# Altium PCB PSM.PcbDoc
Units mm, origin at the board's own origin, x right, y up, seen from the top; angles counter-clockwise.
Board outline 22.96 x 19.96 mm, 4 copper layers (Top, Ground, Power, Bottom), stack 0.79 mm thick; 64 components, 48 nets, 238 pads, 58 vias.
Unrouted connection lines stored in the file: 21.
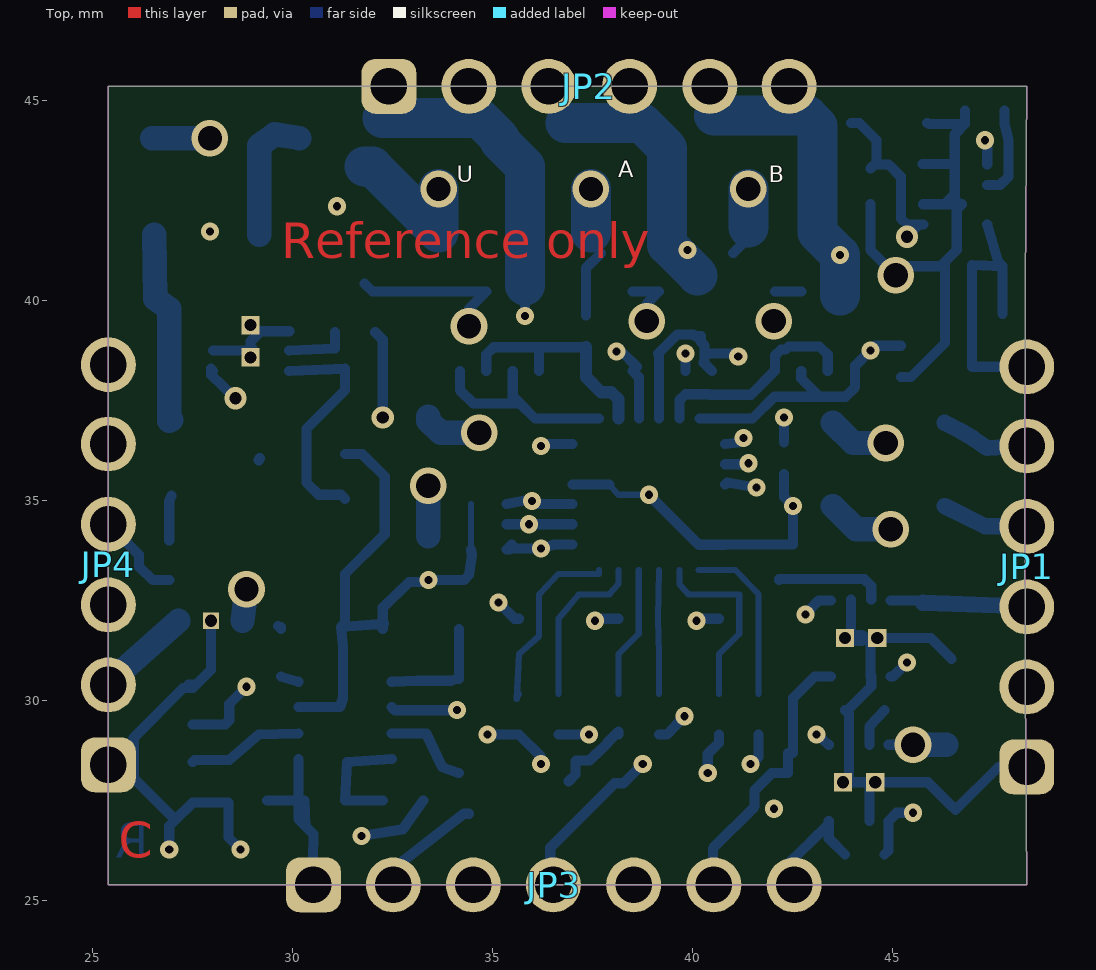
[diagram p0: Top view]
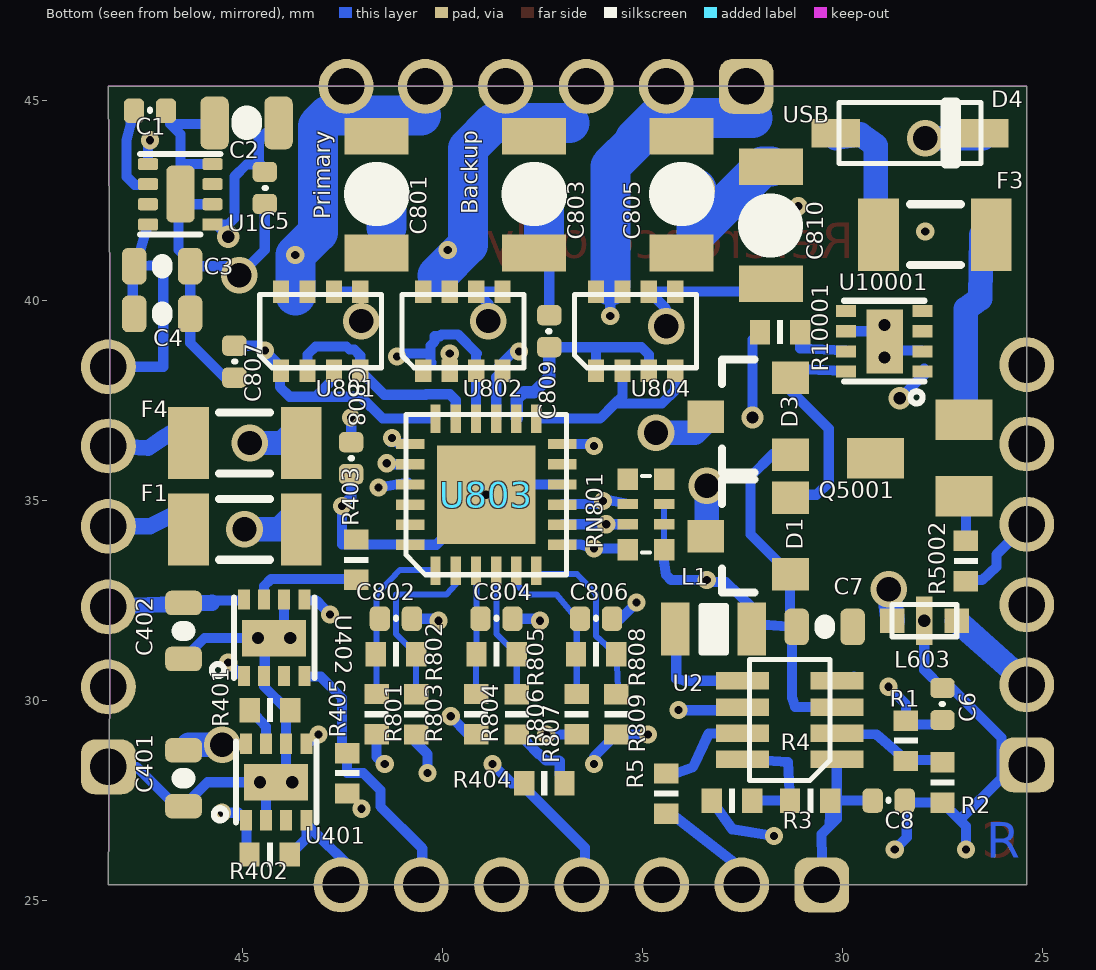
[diagram p1: Bottom view, seen from below]
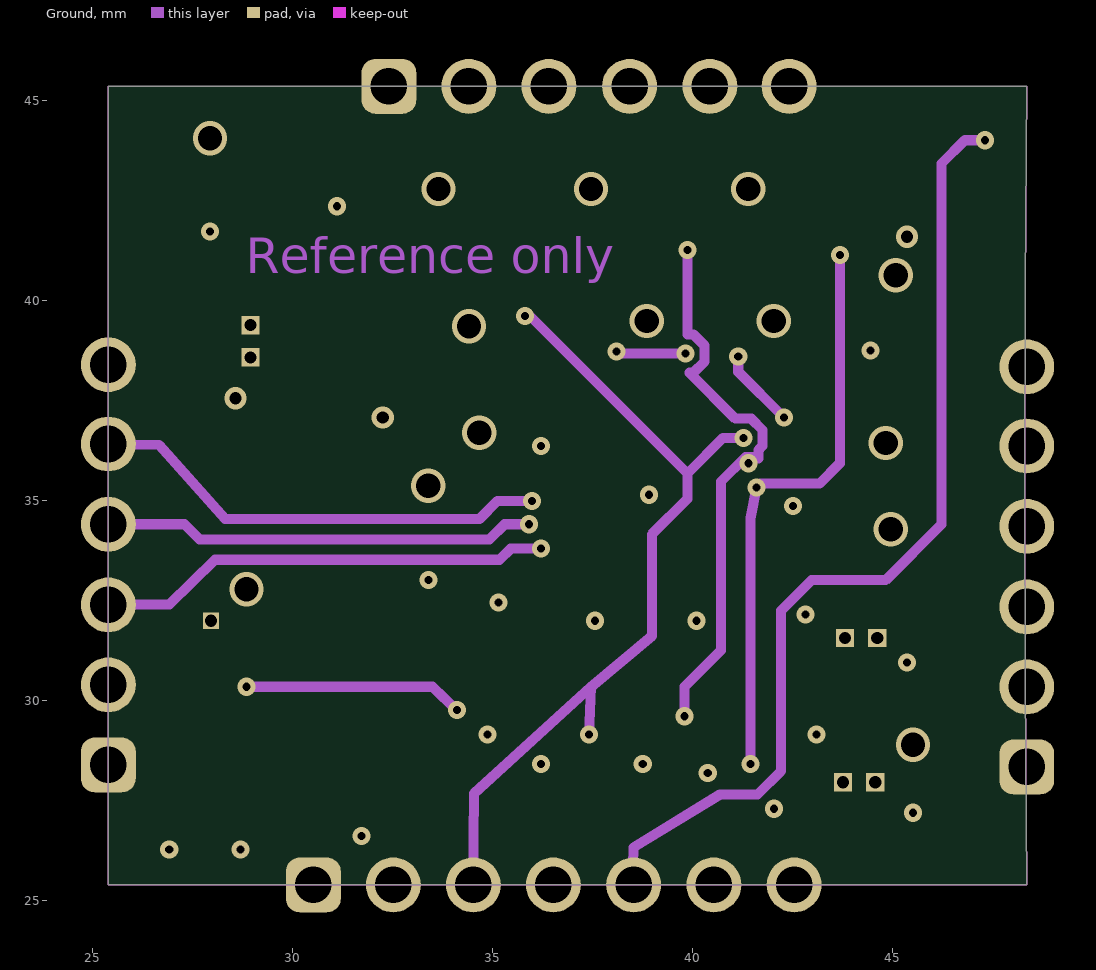
[diagram p2: Ground]
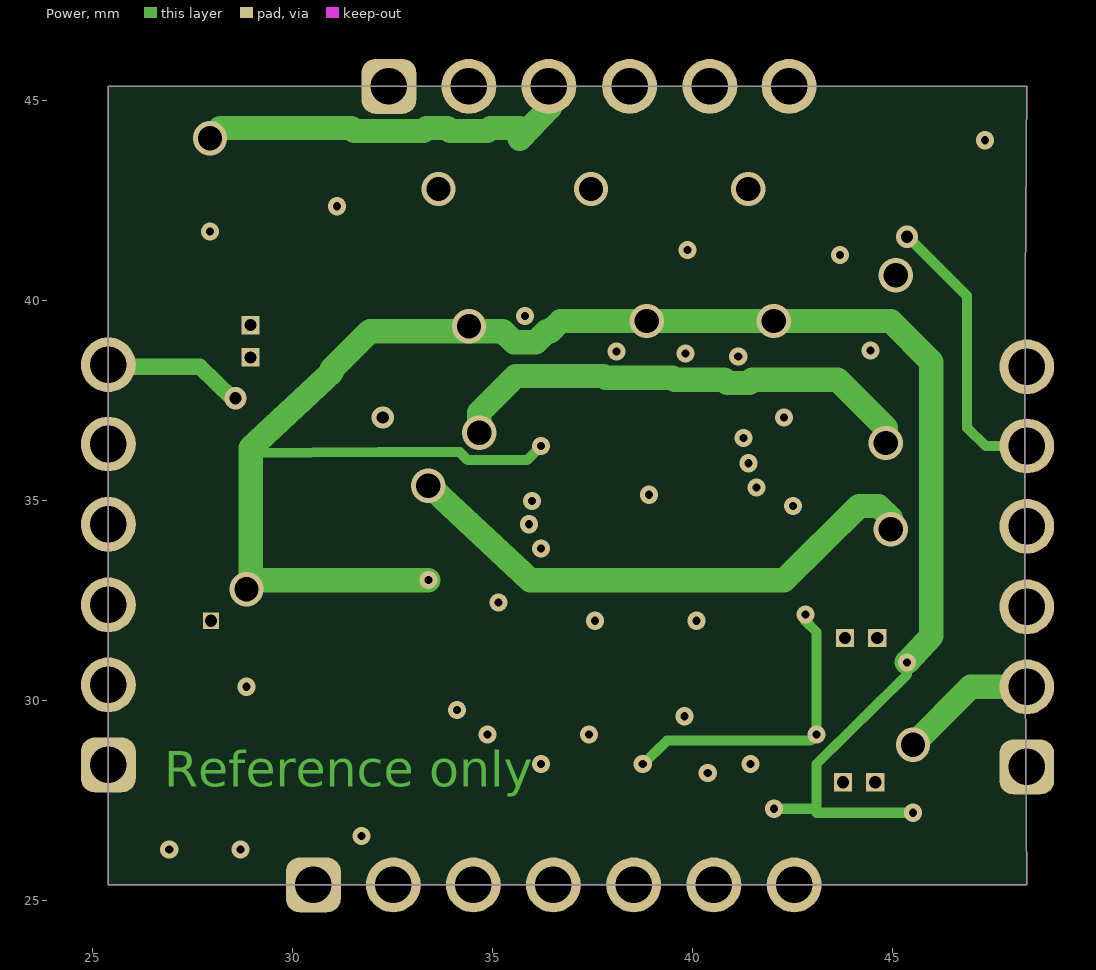
[diagram p3: Power]

## Layer stack, top to bottom
Top Solder: solder mask 0.0102, Solder Resist, Dk 3.5
Top: signal copper 0.035
Dielectric 1: core 0.25, FR-4, Dk 4.8
Ground: signal copper 0.035
Dielectric 2: prepreg 0.15, FR-4, Dk 4.8
Power: signal copper 0.035
Dielectric 3: core 0.25, FR-4, Dk 4.8
Bottom: signal copper 0.035
Bottom Solder: solder mask 0.0102, Solder Resist, Dk 3.5

## Board outline
25.4,25.4 25.4,45.364 48.362,45.364 ccw(c1010.521,35.382) 48.362,25.4

## Design rules (kind name [scope] priority, off if disabled: settings)
Clearance "rule killer" [OnLayer('Keep-Out Layer') vs (IsArc OR IsTrack OR IsPad)] p1: gap=0
Clearance mdViaVia [IsVia vs IsVia] p2: gap=0.127
Clearance mdPadVia [IsPad vs IsVia] p3: gap=0.127
Clearance mdPadPad [IsPad vs IsPad] p4: gap=0.127
Clearance mdWireVia [(InLayerClass('Signal Layers') AND IsTrack) vs IsVia] p5: gap=0.127
Clearance mdWirePad [(InLayerClass('Signal Layers') AND IsTrack) vs IsPad] p6: gap=0.127
Clearance mdWireWire [(InLayerClass('Signal Layers') AND IsTrack) vs (InLayerClass('Signal Layers') AND IsTrack)] p7: gap=0.127
Clearance [All] p8: gap=0.127
ComponentClearance [All] p1 off: gap=0.254 collisioncheckmode=3 verticalgap=0.254 showdistances=FALSE
HoleSize [All] p1: absolutevalues=TRUE maxlimit=2540 minlimit=0.2 maxpercent=80.000 minpercent=20.000
HoleToHoleClearance [All] p1: gap=0.203 allowstackedmicrovias=TRUE
MinimumSolderMaskSliver [All] p1 off: minsoldermaskwidth=0.254
PasteMaskExpansion [All] p1: expansion=0.025
PolygonConnect ThermalVias [IsVia] p1: connectstyle=Direct reliefconductorwidth=0.254 reliefentries=4 polygonreliefangle="90 Angle" airgapwidth=0.254
PolygonConnect [All] p2: connectstyle=Relief reliefconductorwidth=0.254 reliefentries=4 polygonreliefangle="90 Angle" airgapwidth=0.254
RoutingVias [All] p1: holewidth=0.711 width=1.27 viastyle="Through Hole" minholewidth=0.2 minwidth=0.45 maxholewidth=0.711 maxwidth=1.27
SilkToSilkClearance [All] p1 off: silktosilkclearance=0.254
SilkToSolderMaskClearance [IsPad] p1 off: minsilkscreentomaskgap=0.254 clearancetoexposedcopper=TRUE
SolderMaskExpansion [All] p1: expansion=0.025
Width [All] p1: maxlimit=1 minlimit=0.15 preferedwidth=0.254
23 further rules are at their usual default settings.

## Classes and differential pairs
component class PSM_footprint: JP1 JP2 JP3 JP4
component class PSM_components: C1 C2 C3 C4 C5 C6 C7 C8 C401 C402 C801 C802 C803 C804 C805 C806 C807 C808 C809 C810 D1 D3 D4 F1 F3 F4 L1 L603 Q5001 R1 R2 R3 R4 R5 R401 R402 R403 R404 R405 R801 R802 R803 R804 R805 R806 R807 R808 R809 R5002 R10001 RN801 U1 U2 U401 U402 U801 U802 U803 U804 U10001

## Components (designator, comment, footprint, x,y, rotation, side; value= is the part's Value field where it differs from the comment)
C1 "10n" 0402-CAP 47.32,44.755 r180 bottom
C2 "10u/25V" 0805-CAP 44.907,44.45 r0 bottom
C3 "1u" 0603-CAP 47.015,40.869 r180 bottom
C4 "10u" 0603-CAP 47.015,39.675 r180 bottom
C5 "0u1" 0402-CAP 44.45,42.824 r270 bottom
C6 "0u47" 0402-CAP 27.508,29.921 r90 bottom
C7 "1u" 0603-CAP 30.455,31.852 r180 bottom
C8 "5n6" 0402-CAP 28.854,27.508 r180 bottom
C401 "10u" 0603-CAP 46.482,28.067 r270 bottom
C402 "10u" 0603-CAP 46.482,31.75 r270 bottom
C801 "100u" 1206-CAP 41.656,42.672 r270 bottom
C802 "10p/25V" 0402-CAP 41.173,32.055 r180 bottom
C803 "100u" 1206-CAP 37.719,42.672 r270 bottom
C804 "10p/25V" 0402-CAP 38.659,32.055 r180 bottom
C805 "100u" 1206-CAP 34.036,42.672 r270 bottom
C806 "1000p/25V" 0402-CAP 36.17,32.055 r180 bottom
C807 "0u1 25v" 0402-CAP 45.212,38.481 r270 bottom
C808 "0u1 25v" 0402-CAP 42.291,36.068 r270 bottom
C809 "0u1 25v" 0402-CAP 37.338,39.243 r90 bottom
C810 "100u" 1206-CAP 31.801,41.885 r90 bottom
D1 "PMEG2005CT" SOT23-3 32.309,34.112 r90 bottom
D3 "PMEG2005CT" SOT23-3 32.309,37.109 r90 bottom
D4 "MMSZ5232BT1G" SOD-123 28.321,44.196 r0 bottom
F1 "0ZCA0035FF2G" PTC-1206 44.958,34.29 r180 bottom
F3 "0ZCA0035FF2G" PTC-1206 27.686,41.656 r0 bottom
F4 "0ZCA0020FF2E" PTC-1206 44.958,36.449 r180 bottom
JP1 "Power_out" 1X06M 48.362,33.35 r90 top
JP2 "POWER_IN" 1X06M 37.414,45.364 r0 top
JP3 "PINHD-1X7_2.00" 1X07M 36.525,25.4 r0 top
JP4 "FMU_Power" 1X06M 25.4,33.401 r90 top
L1 "47uH" 0805-IND 33.223,31.801 r0 bottom
L603 "Kyocera KNH16C104DA5TS EMI filter" KYOCERA-KNH16-DA 27.965,32.004 r180 bottom
Q5001 "MMBT3906*SMD" SOT23-BEC 28.067,36.068 r90 bottom
R1 "453K" 0402-RES 28.423,29.007 r270 bottom
R2 "16K5" 0402-RES 27.508,27.965 r270 bottom
R3 "100K" 0402-RES 30.81,27.508 r0 bottom
R4 "10K" 0402-RES 32.766,27.508 r0 bottom
R5 "9K09" 0402-RES 34.417,27.686 r270 bottom
R401 "16K5" 0402-RES 44.323,29.769 r180 bottom
R402 "1M" 0402-RES 44.323,26.162 r0 bottom
R403 "25K5" 0402-RES 42.164,33.528 r90 bottom
R404 "10K" 0402-RES 37.465,27.94 r180 bottom
R405 "1M" 0402-RES 42.393,28.194 r270 bottom
R801 "453K" 0402-RES 41.656,29.667 r90 bottom
R802 "56K" 0402-RES 41.173,31.166 r180 bottom
R803 "105K" 0402-RES 40.665,29.667 r270 bottom
R804 "453K" 0402-RES 39.167,29.667 r90 bottom
R805 "56K" 0402-RES 38.659,31.166 r180 bottom
R806 "105K" 0402-RES 38.151,29.667 r270 bottom
R807 "453K" 0402-RES 36.652,29.667 r90 bottom
R808 "56K" 0402-RES 36.17,31.166 r180 bottom
R809 "105K" 0402-RES 35.662,29.667 r270 bottom
R5002 "1K" 0402-RES 26.924,33.503 r270 bottom
R10001 "16K5" 0402-RES 31.572,39.218 r180 bottom
RN801 "1M" EXB28V 34.925,34.671 r270 bottom
U1 "MIC5332" MLF-8-EPAD 46.558,42.672 r0 bottom
U2 "LT3469" SOT23-8 31.318,29.515 r90 bottom
U401 "BQ24315" QFN8-DSG 44.171,27.965 r180 bottom
U402 "BQ24315" QFN8-DSG 44.221,31.572 r180 bottom
U801 "MOSFET-DUAL-PCHANNEL-CHIPFET" 1206-8 43.053,39.243 r180 bottom
U802 "MOSFET-DUAL-PCHANNEL-CHIPFET" 1206-8 39.497,39.243 r180 bottom
U803 "LTC4417" MO-220 38.913,35.154 r90 bottom
U804 "MOSFET-DUAL-PCHANNEL-CHIPFET" 1206-8 35.179,39.243 r180 bottom
U10001 "BQ24313" QFN8-DSG 28.956,38.989 r90 bottom

## Footprints (in the part's own frame and the unit in brackets; to place one, negate y for a bottom-side part, rotate by r counter-clockwise, add the part's x,y. Pads: shape width x height; smd on the part's side, far side on the other; paste and mask are expansions set on the pad)
1X06M [mil]
  rrect50% 54x54 hole 36: 1(-196.85,0)
  round 54 hole 36: 2(-118.11,0) 3(-39.37,0) 4(40,0) 5(119,0) 6(197,0)
1X07M [mil] "1X07M"
  rrect50% 54x54 hole 36: 1(-236.22,0)
  round 54 hole 36: 2(-157.48,0) 3(-78.74,0) 4(0,0) 5(79,0) 6(158,0) 7(237,0)
0402-CAP [mil]
  rrect50% 20x24 smd mask+0: P$1(-15.75,0) P$2(15.75,0)
  silkscreen extent 0,0 0,1, body extent -20,-10 20,10, height 20
0402-RES [mil] "0402-RES"
  rect 20x24 smd: P$1(-19.68,0) P$2(20,0)
  silkscreen extent -3,-12 3,12, body extent -20,-10 20,10, height 20
0603-CAP [mil] "0603-CAP"
  rrect50% 24x36 smd mask+0: P$1(-27.56,0) P$2(27.56,0)
  silkscreen extent 0,-2 0,2, body extent -31,-16 31,16, height 34
0805-CAP [mil]
  rrect50% 28x52 smd mask+0: P$1(-31.5,0) P$2(31.5,0)
  silkscreen extent 0,-2 0,2, body extent -39,-25 39,25, height 31
0805-IND [mil]
  rect 28x52 smd: P$1(-37.4,0) P$2(38,0)
  silkscreen extent -12,-23 12,23
1206-8 [mil]
  rect 16x22 smd: P1(-39,-39) P2(-13,-39) P3(13,-39) P4(39,-39) P5(13,39) P5(39,39) P7(-39,39) P7(-13,39)
  silkscreen extent -60,-36 60,36
1206-CAP [mil]
  rect 36x63 smd: P$1(-57.09,0) P$2(58,0)
  silkscreen extent 0,0 0,1
EXB28V [mil] "EXB28V"
  rect 21x20 smd: 1(-34.45,-17.72) 4(35,-17.72) 5(35,18) 8(-34.45,18)
  rect 10x20 smd: 2(-9.84,-17.72) 3(10,-17.72) 6(10,18) 7(-9.84,18)
  silkscreen extent -37,-4 38,4, body extent -40,-20 40,20, height 20
KYOCERA-KNH16-DA [mil] "KYOCERA-KNH16-DA"
  rect 16x16 smd: GND(0,-15.75) GND(0,16)
  rect 16x16 hole 12: GND(0,0)
  rect 24x24 smd: P$1(-31.5,0) P$2(32,0)
  silkscreen extent -31,-16 32,16, body extent -20,-10 20,10, height 14
MLF-8-EPAD [mil] "MLF-8-EPAD"
  rect 20x12 smd: 1(-31.5,30)
  rrect40% 20x12 smd: 2(-31.5,10) 3(-31.5,-9.84) 4(-31.5,-29.53) 5(32,-29.53) 6(32,-9.84) 7(32,10) 8(32,30)
  rrect40% 28x56 smd: GND(0,0)
  silkscreen extent -39,-39 40,40, body extent -40,-39 40,39, height 33
MO-220 [mil] "MO-220"
  rect 10x28 smd: P10(10,-74.8) P$7(-49.21,-74.8) P$8(-29.53,-74.8) P$9(-9.84,-74.8) P$11(30,-74.8) P$12(50,-74.8) P$19(50,75) P$20(30,75) P$21(10,75) P$22(-9.84,75) P$23(-29.53,75) P$24(-49.21,75)
  rect 97x97 smd paste-11.81: P25(0,0)
  rect 28x10 smd: P$1(-74.8,50) P$2(-74.8,30) P$3(-74.8,10) P$4(-74.8,-9.84) P$5(-74.8,-29.53) P$6(-74.8,-49.21) P$13(75,-49.21) P$14(75,-29.53) P$15(75,-9.84) P$16(75,10) P$17(75,30) P$18(75,50)
  silkscreen extent -79,-79 79,79, body extent -79,-79 79,79, height 35
PTC-1206 [mil] "PTC-1206"
  rect 40x71 smd: 1(-55.12,0) 2(56,0)
  silkscreen extent -25,-30 25,30, body extent -60,-30 65,30, height 20
QFN8-DSG [mil] "QFN8-DSG"
  rect 12x20 smd: 1(-29.53,-37.4) 2(-9.84,-37.4) 3(10,-37.4) 4(30,-37.4) 5(30,38) 6(10,38) 7(-9.84,38) 8(-29.53,38)
  rect 18x18 hole 12: GND(-15.75,0) GND(16,0)
  rect 63x36 smd: GND(0,0)
  silkscreen extent -61,-39 40,40, body extent -39,-40 39,40, height 33
SOD-123 [mil] "SOD-123"
  rect 48x28 smd: A(73,0) C(-72.83,0)
  silkscreen extent -70,-30 70,30, body extent -49,-24 49,25, height 35
SOT23-3 [mil] "SOT23-3"
  rect 32x36 smd: 1(-37.4,-39.37) 2(38,-39.37) 3(0,44)
  silkscreen extent -55,-4 56,28, body extent -57,-55 57,55, height 51
SOT23-8 [mil] "SOT23-8"
  rect 17x52 smd: 1(-38.39,-46.26) 2(-12.8,-46.26) 3(13,-46.26) 4(39,-46.26) 5(39,47) 6(13,47) 7(-12.8,47) 8(-38.39,47)
  silkscreen extent -59,-39 60,40, body extent -59,-55 59,55, height 44
SOT23-BEC [mil] "SOT23-BEC"
  rect 40x56 smd: B(-37.4,-43.31) C(0,44) E(38,-43.31)
  body extent -57,-55 57,55, height 51

## Part data
C1 C5 C6 C8 C802 C804 C806 C807 C808 C809: library part CAP0402
C2: library part CAP0805
C3 C4 C7 C401 C402: library part CAP0603
C801 C803 C805 C810: library part CAP1206
D4: library part DIODESOD-123
F1 F3 F4: library part PTCSMD
JP1 JP2 JP4: library part PINHD-1X6_2.00
L1: library part INDUCTOR0805
L603: library part KNH16C104DA5TS
R1 R2 R3 R4 R5 R401 R402 R403 R404 R405 R801 R802 R803 R804 R805 R806 R807 R808 R809 R5002 R10001: library part RESISTOR0402-RES
RN801: library part 4R-NEXB28V
U801 U802 U804: "MOSFET 2P-CH 20V 2.9A CHIPFET"
U803: library part LTC4117

## Via types
v1: diameter 0.453/0.453/0.453/0.453 (per signal layer), hole 0.203, Top to Bottom, tented both sides, 41 vias
v2: diameter 0.914/0.86/0.86/0.914 (per signal layer), hole 0.61, Top to Bottom, tented both sides, 14 vias
v3: diameter 0.555/0.555/0.555/0.555 (per signal layer), hole 0.305, Top to Bottom, tented both sides, 3 vias

## Nets (pads, with @x,y where several pads share a name; then routed paths per layer and width w, separated by ;. In a path a pad name is that pad's centre, name@x,y a point inside that pad or via, vN(x,y) a via of type N, cw(c..) or ccw(c..) an arc to the next point about the centre after c; other vN are vias at no path point)
ALARM: JP3.2 R5.P$2 | length 2.8
  Bottom w0.254: JP3.2@32.512,25.4 32.487,25.781 34.289,27.178 R5.P$2
BUZZER_OUT: C8.P$1 JP3.1 R3.P$1 U2.1 | length 5.1
  Bottom w0.254: C8.P$1@29.362,27.508 30.302,27.508 30.328,26.873 30.15,27.051 ; U2.1@30.15,28.55 30.15,27.051 ; JP3.1@30.505,25.4 30.531,26.67 30.15,27.051
GND: C1.P$2 C2.P$2 C3.P$2 C4.P$2 C5.P$2 C6.P$2 C7.P$2 C8.P$2 C401.P$2 C402.P$2 C801.P$2 C802.P$2 C803.P$2 C804.P$2 C805.P$2 C806.P$2 C807.P$2 C808.P$2 C809.P$2 C810.P$2 JP1.1 JP4.1 L603.GND Q5001.C R2.P$2 R4.P$2 R401.P$2 R403.P$2 R404.P$2 R803.P$2 R806.P$2 R809.P$2 R10001.P$1 U1.2 U1.4 U1.GND U2.4 U401.2 U401.6 U401.GND U402.2 U402.6 U402.GND U803.P10 U803.P25 U803.P$24 U10001.2 U10001.5 U10001.6 U10001.GND | length 68.7
  Bottom w0.152: U803.P25@37.922,35.408 38.151,35.154 v1(38.913,35.154)
  Bottom w0.254: v1(26.924,26.289) 26.924,26.873 27.076,27.026 ; C6.P$2@27.407,30.404 C6.P$2@27.559,30.404 ; L603.GND@27.965,32.004 27.965,31.604 27.965,30.778 C6.P$2 27.273,30.321 26.035,29.083 26.035,28.067 27.076,27.026 ; U10001.2@28.016,38.76 28.829,38.76 U10001.GND@28.956,38.608 ; v1(28.702,26.289) 28.404,26.587 28.404,27.457 R2.P$2 27.076,27.026 ; U10001.GND@29.007,38.811 U10001.GND@28.956,38.608 ; Q5001.C@29.159,36.017 Q5001.C ; C7.P$2@29.642,31.877 29.718,31.801 C7.P$2@29.718,31.852 ; U2.4@29.718,30.607 U2.4@30.15,30.48 ; U10001.6 29.21,39.243 28.956,38.989 U10001.GND@28.956,38.608 ; v1(31.725,26.619) 32.763,26.792 R4.P$2 ; R10001.P$1 32.258,39.032 v3(32.258,37.084) ; v1(34.874,29.159) R809.P$2 36.22,28.6 v1(36.22,28.423) ; v1(35.154,32.461) 35.56,32.055 C806.P$2@35.662,32.055 ; R404.P$2@36.906,27.991 37.078,28.163 37.078,28.493 37.092,28.507 37.422,28.507 37.594,28.679 37.613,28.679 37.895,28.96 37.895,28.979 38.151,29.235 R806.P$2 ; U803.P10@37.008,35.408 U803.P25@37.922,35.408 ; C809.P$2 37.338,40.818 C803.P$2 ; v1(37.567,32.004) 37.592,32.055 C804.P$2@38.151,32.055 ; v1(38.913,35.154) 40.163,33.904 U803.P$24 ; v1(40.107,32.004) 40.157,32.055 C802.P$2@40.665,32.055 ; v1(40.386,28.194) 40.386,28.677 40.665,28.956 R803.P$2 ; U803.P$24@40.818,33.909 42.52,33.909 v1(42.52,34.874) 42.291,35.103 C808.P$2 ; C801.P$2@41.021,41.199 41.529,41.707 ; U402.GND@43.815,31.572 43.967,31.725 U402.6 ; U402.GND@44.221,31.572 U402.GND@44.602,31.572 ; U401.2@44.425,27 44.425,27.813 U401.GND@44.552,27.965 ; U402.2@44.45,30.607 44.45,31.42 U402.GND@44.602,31.572 ; C5.P$2 44.45,41.275 v2(45.085,40.64) 45.314,40.869 C3.P$2 C4.P$2 46.315,38.949 45.466,38.1 C807.P$2@45.212,38.1 ; U402.2 44.471,30.361 43.88,29.769 R401.P$2 43.917,29.667 U401.6 43.917,28.118 43.764,27.965 44.171,27.965 U401.GND@44.552,27.965 ; U1.4 46.546,43.422 46.558,43.434 ; U1.2@45.771,42.418 46.736,42.418 46.609,42.291 46.609,41.275 46.253,40.919 C3.P$2@46.253,40.869 ; C2.P$2@45.872,44.45 45.923,44.425 46.812,44.425 ; U1.GND@46.304,42.418 U1.GND ; C401.P$2 45.884,27.965 44.571,27.965 U401.GND@44.552,27.965 ; C402.P$2 45.96,31.572 44.621,31.572 U402.GND@44.602,31.572 ; C401.P$2@46.577,27.273 47.654,28.35 JP1.1 ; U1.GND@46.609,42.418 U1.GND ; C1.P$2@46.812,44.755 46.812,44.425 ; U1.GND 46.558,43.434 ; 46.558,43.434 46.558,44.171 46.812,44.425
  Bottom w0.406: U402.GND@43.815,31.572 U402.GND@44.221,31.572
  Bottom w1: C810.P$2 32.004,43.358 33.655,41.707 v2(33.655,42.799) ; 37.465,41.707 v2(37.465,42.799) ; 41.402,41.834 v2(41.402,42.799)
  other v1: 27.94,41.732 31.115,42.367
NC: C2.P$1 C5.P$1 F4.1 JP1.5 U1.1 | length 14.3
  Power w0.254: v3(45.364,41.605) 45.364,41.504 45.339,41.656 46.863,40.132 46.863,36.83 47.346,36.373 JP1.5
  Bottom w0.254: C2.P$1@43.967,44.45 44.171,44.45 44.602,44.018 44.602,43.459 44.45,43.307 44.552,43.409 44.907,43.409 45.212,43.104 45.212,42.062 45.364,41.91 45.771,41.91 45.669,41.91 v3(45.364,41.605)
  Bottom w0.406: F4.1@46.304,36.957 cw(c43.37,30.813) 47.371,36.322 JP1.5
NetC1_P$1: C1.P$1 U1.6 | length 2.3
  Bottom w0.254: U1.6@47.371,42.901 47.701,42.901 47.904,43.104 47.904,44.018 47.803,44.425 C1.P$1@47.803,44.755
NetC6_P$1: C6.P$1 R1.P$1 U2.6 | length 9.1
  Ground w0.254: v1(28.854,30.353) 33.503,30.353 v1(34.112,29.769)
  Bottom w0.254: C6.P$1@27.508,29.413 28.321,29.413 28.423,29.515 28.423,29.921 v1(28.854,30.353) ; U2.6@32.487,29.845 32.563,29.769 v1(34.112,29.769)
NetC802_P$1: C802.P$1 R801.P$2 R802.P$1 U803.P$1 | length 4.2
  Bottom w0.152: U803.P$1@40.157,33.274 41.072,33.274 41.656,32.664 41.656,32.055 41.656,31.166 R801.P$2
NetC804_P$1: C804.P$1 R804.P$2 R805.P$1 U803.P$3 | length 3.1
  Bottom w0.152: R804.P$2 39.167,31.166 39.141,32.055 U803.P$3@39.167,33.274
NetC806_P$1: C806.P$1 R807.P$2 R808.P$1 U803.P$5 | length 4.1
  Bottom w0.152: R807.P$2 36.652,31.166 36.652,32.055 37.16,32.664 37.922,32.664 38.151,32.918 U803.P$5@38.151,33.274
NetC807_P$1: C807.P$1 U801.P1 U801.P3 U803.P$18 | length 6.9
  Bottom w0.254: U803.P$18 41.504,37.059 42.05,37.605 43.18,37.605 ; U801.P3 42.723,38.062 43.18,37.605 ; C807.P$1 44.571,38.881 v1(44.45,38.76) 44.069,38.379 44.069,37.846 43.828,37.605 43.18,37.605
NetC808_P$1: C808.P$1 U802.P1 U802.P3 U803.P$16 | length 7.4
  Ground w0.254: v1(41.148,38.608) 41.148,38.227 v1(42.291,37.084)
  Bottom w0.254: U803.P$16 U802.P3 39.167,38.684 39.148,38.684 39.628,39.165 40.026,39.165 40.075,39.116 40.208,39.116 40.208,38.983 40.308,38.883 40.308,38.684 ; U802.P1 40.284,38.456 40.284,38.462 40.308,38.485 40.308,38.684 ; v1(41.148,38.608) 41.072,38.684 40.308,38.684 ; C808.P$1 v1(42.291,37.084)
NetC809_P$1: C809.P$1 U803.P$14 U804.P1 U804.P3 | length 5.8
  Bottom w0.254: U804.P3 34.849,38.659 35.033,38.843 36.186,38.843 ; U804.P1 36.17,38.827 36.186,38.843 ; C809.P$1 36.186,38.843
  Bottom w0.305: C809.P$1 37.338,38.1 37.719,37.719 37.973,37.719 38.151,37.541 U803.P$14@38.151,37.059
NetD1_2: D1.2 D3.2 U10001.8 | length 5.8
  Bottom w0.254: U10001.8@29.921,38.252 31.318,38.303 31.318,38.075 31.318,37.77 30.353,36.805 30.353,35.458 30.658,35.154 31.217,35.154 D1.2@31.318,35.052
NetD1_3: D1.3 F1.2 | length 16.7
  Power w0.61: v2(33.401,35.382) 33.553,35.255 35.941,33.02 42.291,33.02 44.171,34.874 44.653,34.874 44.958,34.569 v2(44.958,34.29)
  Bottom w0.61: v2@33.35,35.306 v2(33.401,35.382) D1.3@33.401,34.112 ; F1.2@43.51,34.874 44.094,34.29 v2(44.958,34.29)
NetD3_3: D3.3 F4.2 | length 15.1
  Power w0.61: v2(34.671,36.703) 34.671,37.211 35.583,38.123 37.78,38.123 37.827,38.077 39.504,38.077 39.554,38.026 40.799,38.026 40.875,37.95 41.421,37.95 41.497,38.026 43.635,38.026 44.831,36.83 v2(44.831,36.449)
  Bottom w0.61: D3.3@33.401,37.109 33.401,37.008 33.706,36.703 v2(34.671,36.703) ; F4.2@43.51,36.957 44.018,36.449 v2(44.831,36.449)
NetD4_A: D4.A F3.2 | length 3.3
  Bottom w0.61: F3.2@29.176,41.656 29.176,43.887 29.56,44.166 D4.A@30.175,44.069
NetF3_1: F3.1 Q5001.E | length 5
  Bottom w0.254: F3.1@26.543,41.656 F3.1@26.619,41.707
  Bottom w0.61: F3.1@26.543,41.656 26.568,40.056 26.924,39.802 26.924,37.008 Q5001.E@26.975,37.033
NetL1_P$2: L1.P$2 U2.5 | length 2.9
  Bottom w0.254: U2.5@32.487,30.48 33.122,30.505 33.96,30.505 34.163,30.556 L1.P$2@34.163,31.801
NetQ5001_B: Q5001.B R5002.P$1 | length 1.1
  Bottom w0.254: R5002.P$1@26.924,34.011 26.924,35.001 Q5001.B@26.975,35.128
NetR1_P$2: R1.P$2 R2.P$1 U2.2 | length 2.9
  Bottom w0.254: R2.P$1@27.508,28.473 27.559,28.524 28.423,28.524 29.159,29.159 U2.2@30.15,29.185
NetR3_P$2: R3.P$2 R4.P$1 U2.8 | length 3
  Bottom w0.254: R4.P$1@32.258,27.508 R3.P$2 31.369,28.473 U2.8@32.487,28.55
NetR5_P$1: R5.P$1 U2.7 | length 2.2
  Bottom w0.254: U2.7@32.487,29.185 33.35,29.185 33.746,28.344 R5.P$1@34.163,28.194
NetR401_P$1: R401.P$1 U401.7 | length 1
  Bottom w0.254: U401.7@44.425,28.905 44.425,29.362 R401.P$1@44.806,29.769
NetR403_P$1: R403.P$1 U402.7 | length 2.7
  Bottom w0.254: R403.P$1 42.164,33.045 44.298,33.045 44.471,32.872 U402.7
NetR802_P$2: R802.P$2 R803.P$1 U803.P$2 | length 4.7
  Bottom w0.152: U803.P$2@39.675,33.274 39.675,32.918 39.903,32.664 41.173,32.664 41.173,31.674 R802.P$2 R803.P$1@40.665,30.175
NetR805_P$2: R805.P$2 R806.P$1 U803.P$4 | length 3.3
  Bottom w0.152: R806.P$1@38.151,30.175 R805.P$2 38.659,31.674 U803.P$4@38.659,33.274
NetR808_P$2: R808.P$2 R809.P$1 U803.P$6 | length 4.8
  Bottom w0.152: R809.P$1@35.662,30.175 35.611,30.048 R808.P$2 36.17,31.623 36.17,32.664 36.652,33.172 37.668,33.172 U803.P$6@37.668,33.274
NetR10001_P$2: R10001.P$2 U10001.7 | length 1.6
  Bottom w0.254: U10001.7@29.921,38.76 31.064,38.811 R10001.P$2
NetU801_P2: U801.P2 U801.P4 U803.P$17 | length 5.4
  Bottom w0.254: U803.P$17 39.675,37.516 39.827,37.668 40.415,37.668 40.428,37.655 41.465,37.655 U801.P4 42.062,38.633 42.215,38.786 42.332,38.786 42.408,38.862 43.18,38.862 43.383,38.659 U801.P2
NetU802_P2: U802.P2 U802.P4 U803.P$15 | length 4.2
  Ground w0.254: v1@38.1,38.684 v1(39.827,38.684)
  Bottom w0.254: v1(38.1,38.735) 38.227,38.735 38.608,38.354 U802.P4 38.663,38.096 U803.P$15 ; U802.P2 v1(39.827,38.684)
NetU803_P$13: U803.P$13 U804.P2 U804.P4 | length 5.1
  Bottom w0.152: U803.P$13 U803.P$13@37.668,37.059
  Bottom w0.254: U804.P4 34.188,37.77 34.519,37.44 35.687,37.44 ; U804.P2 35.509,37.617 35.687,37.44 ; U803.P$13 36.068,37.059 35.687,37.44
RX: F1.1 JP1.4 | length 2.2
  Bottom w0.406: F1.1@46.304,34.874 47.32,34.366 JP1.4
SERVO_POWER_IN: JP4.6 U10001.1 | length 4.6
  Power w0.406: JP4.6 25.451,38.354 27.686,38.354 28.499,37.567 v3(28.575,37.567)
  Bottom w0.254: U10001.1@28.016,38.252 27.965,38.303 27.965,38.151 v3(28.575,37.567)
V\B\U\S\_\V\A\L\I\D\: JP4.5 RN801.2 U803.P$9 | length 13.4
  Ground w0.254: JP4.5 26.67,36.398 28.321,34.544 34.671,34.544 35.128,35.001 v1(35.992,35.001)
  Bottom w0.254: RN801.2@35.357,34.925 35.992,35.052 v1(35.992,35.001) 36.093,34.925 U803.P$9@37.008,34.925
V\D\D\_\5\V\_\H\I\P\O\W\E\R\_\O\C\: JP3.7 R402.P$1 U401.4 | length 3
  Bottom w0.254: JP3.7@42.52,25.4 42.443,25.984 42.951,26.467 43.409,26.924 43.409,27 43.409,26.568 R402.P$1@43.815,26.162
V\D\D\_\5\V\_\P\E\R\I\P\H\_\E\N\: JP3.4 R404.P$1 U401.5 U402.5 | length 12.7
  Power w0.254: v1(38.76,28.423) 39.37,29.007 42.951,29.007 v1(43.104,29.159) 43.104,31.725 42.824,32.004 v1(42.824,32.156)
  Bottom w0.254: JP3.4@36.424,25.502 JP3.4 ; JP3.4@36.449,25.908 36.449,26.328 38.061,27.94 38.278,27.94 v1(38.76,28.423) ; v1(42.824,32.156) 43.155,32.512 U402.5@43.459,32.512 ; v1(43.104,29.159) U401.5@43.409,28.905
V\D\D\_\5\V\_\P\E\R\I\P\H\_\O\C\: JP3.6 R405.P$1 U402.4 | length 6.5
  Bottom w0.254: JP3.6@40.513,25.781 40.513,26.314 41.556,27.358 41.556,27.768 41.983,28.194 42.393,28.194 R405.P$1 ; R405.P$1@42.52,28.694 42.52,30.074 43.053,30.607 U402.4@43.459,30.607
V\D\D\_\B\A\C\K\U\P\_\V\A\L\I\D\: JP4.4 R5002.P$2 RN801.3 U803.P$8 | length 14.8
  Ground w0.254: JP4.4 27.305,34.417 27.686,34.036 34.925,34.036 35.306,34.417 v1(35.916,34.417)
  Bottom w0.254: JP4.4 26.162,33.655 26.162,33.35 26.518,33.02 R5002.P$2@26.924,33.02 ; RN801.3@35.357,34.417 v1(35.916,34.417) U803.P$8@37.008,34.417
V\D\D\_\B\R\I\C\K\_\V\A\L\I\D\: JP4.3 RN801.4 U803.P$7 | length 13.3
  Ground w0.254: JP4.3@25.4,32.41 26.924,32.41 28.067,33.528 35.179,33.528 35.458,33.807 v1(36.22,33.807)
  Bottom w0.254: RN801.4@35.433,33.782 35.357,33.782 RN801.4@35.382,33.807 ; RN801.4@35.484,33.909 RN801.4@35.382,33.807 ; U803.P$7@37.008,33.909 36.551,33.909 v1(36.22,33.807) RN801.4@35.382,33.807
VBUS: C805.P$1 JP2.1 JP2.2 JP3.3 R807.P$1 U803.P$19 U804.P7 | length 30.4
  Ground w0.254: JP3.3@34.519,25.4 34.544,27.686 37.465,30.353 ; v1(35.814,39.624) 35.941,39.624 39.878,35.687 ; v1(37.414,29.159) 37.465,30.353 ; v1(41.275,36.576) 40.767,36.576 39.878,35.687 ; 37.465,30.353 38.989,31.623 38.989,34.163 39.878,35.052 39.878,35.687
  Bottom w0.254: v1(35.814,39.624) 35.814,40.31 ; R807.P$1@36.652,29.159 v1(37.414,29.159) ; U803.P$19 41.3,36.474 41.275,36.5 v1(41.275,36.576)
  Bottom w1: 32.258,44.577 34.671,44.577 35.195,44.053 35.195,43.983 35.814,43.364 35.814,40.386
VDD_3V3_SPEKTRUM: C3.P$1 C4.P$1 JP1.6 U1.8 | length 7
  Bottom w0.254: U1.8 47.65,40.97 C3.P$1@47.752,40.869 ; C4.P$1@47.752,39.675 C3.P$1@47.752,40.869 ; JP1.6 46.99,38.354 46.99,40.894 C3.P$1@47.752,40.869
VDD_3V3_SPEKTRUM_EN: JP3.5 U1.5 | length 25.1
  Ground w0.254: JP3.5@38.506,25.4 38.532,26.34 40.691,27.661 41.631,27.661 42.215,28.245 42.215,32.258 42.977,33.02 44.831,33.02 46.228,34.417 46.228,43.434 46.812,44.018 v1(47.32,44.018)
  Bottom w0.254: v1(47.32,44.018) 47.371,43.967 U1.5@47.371,43.409
VDD_5V_BACKUP: C803.P$1 D4.C JP2.3 JP2.4 R804.P$1 U802.P7 U803.P$20 | length 33
  Ground w0.254: v1(39.802,29.616) 39.802,30.353 40.716,31.267 40.716,35.484 41.328,36.095 41.629,36.095 41.656,36.068 41.656,36.277 41.756,36.377 41.756,36.775 41.474,37.057 41.076,37.057 39.929,38.204 40.026,38.204 40.308,38.485 40.308,38.883 40.026,39.165 39.878,39.165 v1(39.878,41.275)
  Power w0.61: v2(27.94,44.069) 28.194,44.323 31.473,44.323 31.55,44.247 33.279,44.247 33.355,44.323 33.875,44.323 33.951,44.247 34.877,44.247 34.953,44.323 35.684,44.323 35.69,44.057 JP2.3@36.434,44.831
  Bottom w0.254: R804.P$1@39.167,29.159 39.37,29.159 v1(39.802,29.616) ; U803.P$20 41.377,35.916 v1(41.402,35.941)
  Bottom w0.61: D4.C@26.492,44.069 v2(27.94,44.069) ; JP2.4 JP2.4@38.672,45.133
  Bottom w1: 36.83,44.45 38.735,44.45 39.37,43.815 39.37,41.402 40.132,40.64
VDD_5V_BRICK: C801.P$1 JP2.5 JP2.6 R801.P$1 U801.P7 U803.P$21 | length 23.3
  Ground w0.254: v1(41.453,28.423) 41.453,34.569 v1(41.605,35.331) 41.707,35.433 43.18,35.433 43.688,35.941 v1(43.688,41.148)
  Bottom w0.254: U803.P$21 40.869,35.458 v1(41.605,35.331) ; v1(41.453,28.423) 41.656,28.6 R801.P$1@41.656,29.159
  Bottom w1: 40.544,44.63 42.873,44.63 43.125,44.378 43.125,41.711 v1(43.688,41.148) 43.688,40.132
VDD_5V_HIPOWER: C401.P$1 JP1.2 U401.8 | length 5.6
  Power w0.61: v2(45.517,28.905) 46.965,30.353 JP1.2@48.362,30.353
  Bottom w0.254: U401.8@44.907,28.905 v2(45.517,28.905) C401.P$1@46.203,28.905
  Bottom w0.61: v2(45.517,28.905) C401.P$1@46.355,28.905
VDD_5V_IN: C7.P$1 C810.P$1 D1.1 D3.1 L1.P$1 L603.P$1 R402.P$2 R405.P$2 RN801.5 RN801.6 RN801.7 U2.3 U401.1 U402.1 U801.P5 U802.P5 U803.P$12 U804.P5 | length 75.2
  Power w0.254: 28.956,36.322 28.829,36.195 32.156,36.22 34.187,36.22 34.388,36.019 35.867,36.019 v1(36.22,36.373) ; v1(42.037,27.305) 43.104,27.305 43.104,28.423 45.364,30.658 v1(45.364,30.963) ; 43.104,27.203 v1(45.517,27.203)
  Power w0.61: v2(28.854,32.791) v2@28.956,33.02 ; 30.988,38.227 28.956,36.322 v2@28.956,33.02 ; 30.988,38.291 31.94,39.243 35.264,39.243 35.541,38.966 36.087,38.966 36.364,39.243 36.449,39.243 36.703,39.497 44.958,39.497 45.974,38.481 45.974,31.623 v1(45.364,30.963) ; v1(33.401,33.02) v2@28.956,33.02
  Bottom w0.152: RN801.5 RN801.6 RN801.7@34.468,34.925
  Bottom w0.254: U2.3@30.15,29.845 31.191,29.845 31.267,30.074 31.267,31.369 C7.P$1@31.217,31.852 ; D3.1@31.318,36.17 31.75,36.17 32.309,35.611 32.309,34.163 31.318,33.172 31.318,31.953 C7.P$1@31.217,31.852 ; C810.P$1 32.002,40.234 34.188,40.234 34.849,40.234 34.417,39.802 v2(34.417,39.37) ; RN801.5 34.493,33.655 34.417,33.147 34.29,33.02 v1(33.401,33.02) 33.426,32.969 32.918,32.969 32.258,32.334 32.258,31.801 32.283,31.928 C7.P$1@31.217,31.852 ; v1(36.22,36.373) 36.271,36.424 U803.P$12@37.008,36.424 ; U802.P5@38.506,40.234 39.167,40.234 38.862,39.929 v2(38.862,39.497) ; U801.P5@42.062,40.234 U801.P5@42.723,40.234 ; R402.P$2@44.806,26.162 44.907,26.264 44.907,27 45.11,27.203 v1(45.517,27.203) ; U402.1@44.958,30.607 45.009,30.607 v1(45.364,30.963)
  Bottom w0.61: L603.P$1@28.753,32.004 v2(28.854,32.791)
  other v2: 42.037,39.497
VDD_5V_IN_PROT: JP4.2 L603.P$2 | length 2.4
  Bottom w0.61: JP4.2@25.4,30.404 25.806,30.81 L603.P$2
VDD_5V_PERIPH: C402.P$1 JP1.3 U402.8 | length 3.4
  Bottom w0.254: U402.8@44.958,32.512 45.771,32.512
  Bottom w0.406: 45.769,32.457 JP1.3@48.362,32.36
pads on no net: RN801.1 RN801.8 U1.3 U1.7 U401.3 U402.3 U803.P$11 U803.P$22 U803.P$23 U10001.3 U10001.4

## Keep-outs
Keep-Out Layer:
  the board outline again, w0

## Other copper
Top:
  text "Reference only" at 29.718,40.767 h1.52
  text "C" at 25.654,25.781 h1.52
Ground:
  text "Reference only" at 28.829,40.386 h1.52
Power:
  text "Reference only" at 26.797,27.559 h1.52
Bottom:
  text "R" at 26.416,25.781 h1.52

## Silkscreen, mask and mechanical layers (free items; w line width, h text height)
Top Overlay:
  text "A" at 38.151,42.951 h0.7
  text "U" at 34.112,42.824 h0.7
  text "B" at 41.91,42.824 h0.7
Bottom Overlay:
  lines w0.254: 27.178,43.434 27.432,43.434 27.432,44.958 27.178,44.958 27.178,43.434
  text "USB" at 31.496,44.323 h0.7
  text "Backup" at 38.989,42.164 h0.7 r270
  text "Primary" at 42.672,42.037 h0.7 r270
Dimension:
  the board outline again, w0
tDocu:
  drawing of 230 lines, arcs and shapes, not listed
  text "Layer" at 57.785,66.04 h1.52
  text "Name" at 64.417,66.04 h1.52
  text "Material" at 77.003,66.04 h1.52
  text "Thickness" at 88.341,66.04 h1.52
  text "Constant" at 97.699,66.04 h1.52
  text "Board Layer Stack" at 106.379,66.04 h1.52
  text "1" at 57.785,62.992 h1.52
  text "Top Paste" at 64.417,62.992 h1.52
  text "2" at 57.785,59.944 h1.52
  text "Top Overlay" at 64.417,59.944 h1.52
  text "3" at 57.785,56.896 h1.52
  text "Top Solder" at 64.417,56.896 h1.52
  text "Solder Resist" at 77.003,56.896 h1.52
  text "0.010mm" at 88.341,56.896 h1.52
  text "3.5" at 97.699,56.896 h1.52
  text "4" at 57.785,53.848 h1.52
  text "Top" at 64.417,53.848 h1.52
  text "Copper" at 77.003,53.848 h1.52
  text "0.035mm" at 88.341,53.848 h1.52
  text "5" at 57.785,50.8 h1.52
  text "Dielectric 1" at 64.417,50.8 h1.52
  text "FR-4" at 77.003,50.8 h1.52
  text "0.250mm" at 88.341,50.8 h1.52
  text "4.8" at 97.699,50.8 h1.52
  text "6" at 57.785,47.752 h1.52
  text "Ground" at 64.417,47.752 h1.52
  text "Copper" at 77.003,47.752 h1.52
  text "0.035mm" at 88.341,47.752 h1.52
  text "7" at 57.785,44.704 h1.52
  text "Dielectric 2" at 64.417,44.704 h1.52
  text "FR-4" at 77.003,44.704 h1.52
  text "0.150mm" at 88.341,44.704 h1.52
  text "4.8" at 97.699,44.704 h1.52
  text "8" at 57.785,41.656 h1.52
  text "Power" at 64.417,41.656 h1.52
  text "Copper" at 77.003,41.656 h1.52
  text "0.035mm" at 88.341,41.656 h1.52
  text "9" at 57.785,38.608 h1.52
  text "Dielectric 3" at 64.417,38.608 h1.52
  text "FR-4" at 77.003,38.608 h1.52
  text "0.250mm" at 88.341,38.608 h1.52
  text "4.8" at 97.699,38.608 h1.52
  text "10" at 57.785,35.56 h1.52
  text "Bottom" at 64.417,35.56 h1.52
  text "Copper" at 77.003,35.56 h1.52
  text "0.035mm" at 88.341,35.56 h1.52
  text "11" at 57.785,32.512 h1.52
  text "Bottom Solder" at 64.417,32.512 h1.52
  text "Solder Resist" at 77.003,32.512 h1.52
  text "0.010mm" at 88.341,32.512 h1.52
  text "3.5" at 97.699,32.512 h1.52
  text "12" at 57.785,29.464 h1.52
  text "Bottom Overlay" at 64.417,29.464 h1.52
  text "13" at 57.785,26.416 h1.52
  text "Bottom Paste" at 64.417,26.416 h1.52
Drill Drawing:
  lines w0.254: 17.391,78.359 17.391,78.782 17.815,79.206 17.391,79.629 17.391,80.052 17.815,80.052 18.238,79.629 18.661,80.052 19.085,80.052 19.085,79.629 18.661,79.206 19.085,78.782 19.085,78.359 18.661,78.359 18.238,78.782 17.815,78.359 17.391,78.359 ; 17.391,82.592 17.815,82.592 17.815,82.169 18.661,82.169 18.661,82.592 19.085,82.592 19.085,83.439 18.661,83.439 18.661,83.862 17.815,83.862 17.815,83.439 17.391,83.439 17.391,82.592 ; 17.391,86.826 18.238,85.979 19.085,86.826 18.238,87.672 17.391,86.826 ; 17.391,89.789 18.238,90.212 19.085,89.789 18.661,90.636 19.085,91.482 18.238,91.059 17.391,91.482 17.815,90.636 17.391,89.789
  lines w0.381: 15.873,77.216 191.136,77.216 ; 15.873,92.456 191.136,92.456 ; 29.865,73.406 29.865,96.266 ; 43.577,73.406 43.577,96.266 ; 71.255,73.406 71.255,96.266 ; 84.104,73.406 84.104,96.266 ; 102.743,73.406 102.743,96.266 ; 132.96,73.406 132.96,96.266 ; 147.942,73.406 147.942,96.266 ; 166.886,73.406 166.886,96.266 ; 15.873,73.406 191.136,73.406 191.136,96.266 15.873,96.266 15.873,73.406
  text "Symbol" at 18.159,93.599 h1.83
  text "Count" at 31.008,93.599 h1.83
  text "Hole Size" at 44.72,93.599 h1.83
  text "Plated" at 72.398,93.599 h1.83
  text "Hole Type" at 85.247,93.599 h1.83
  text "Drill Layer Pair" at 103.886,93.599 h1.83
  text "Via/Pad" at 134.103,93.599 h1.83
  text "Pad Shape" at 149.085,93.599 h1.83
  text "Template" at 168.029,93.599 h1.83
  text "10" at 31.008,89.789 h1.52
  text "0.305mm (12.00mil)" at 44.72,89.789 h1.52
  text "PTH" at 72.398,89.789 h1.52
  text "Round" at 85.247,89.789 h1.52
  text "Top - Bottom" at 103.886,89.789 h1.52
  text "(Mixed)" at 134.103,89.789 h1.52
  text "(Mixed)" at 149.085,89.789 h1.52
  text "(Mixed)" at 168.029,89.789 h1.52
  text "14" at 31.008,85.979 h1.52
  text "0.610mm (24.00mil)" at 44.72,85.979 h1.52
  text "PTH" at 72.398,85.979 h1.52
  text "Round" at 85.247,85.979 h1.52
  text "Top - Bottom" at 103.886,85.979 h1.52
  text "Via" at 134.103,85.979 h1.52
  text "Rounded" at 149.085,85.979 h1.52
  text "v91h61z86m0mx0" at 168.029,85.979 h1.52
  text "25" at 31.008,82.169 h1.52
  text "0.914mm (36.00mil)" at 44.72,82.169 h1.52
  text "PTH" at 72.398,82.169 h1.52
  text "Round" at 85.247,82.169 h1.52
  text "Top - Bottom" at 103.886,82.169 h1.52
  text "Pad" at 134.103,82.169 h1.52
  text "(Mixed)" at 149.085,82.169 h1.52
  text "(Mixed)" at 168.029,82.169 h1.52
  text "41" at 31.008,78.359 h1.52
  text "0.203mm (8.00mil)" at 44.72,78.359 h1.52
  text "PTH" at 72.398,78.359 h1.52
  text "Round" at 85.247,78.359 h1.52
  text "Top - Bottom" at 103.886,78.359 h1.52
  text "Via" at 134.103,78.359 h1.52
  text "Rounded" at 149.085,78.359 h1.52
  text "v45h20m0mx0" at 168.029,78.359 h1.52
  text "90 Total" at 31.008,74.549 h1.52